# EAGLE board LipoPower (EAGLE 8.1.0)
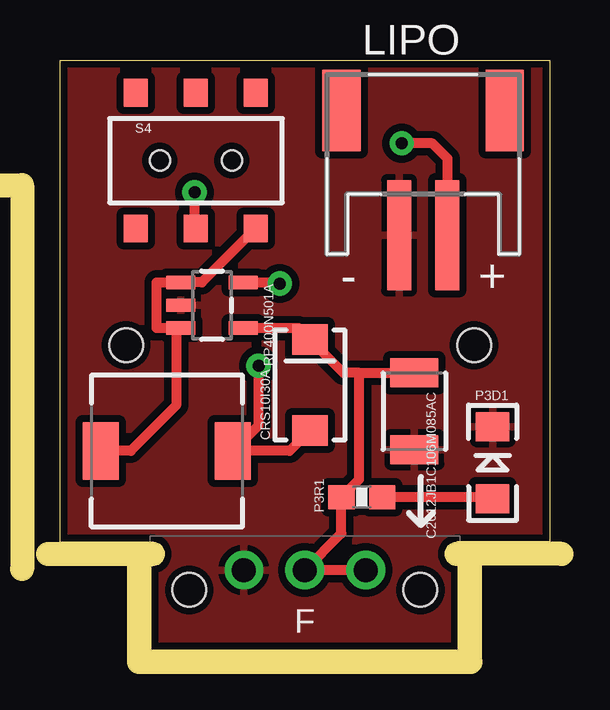
[diagram p0: board, top side]
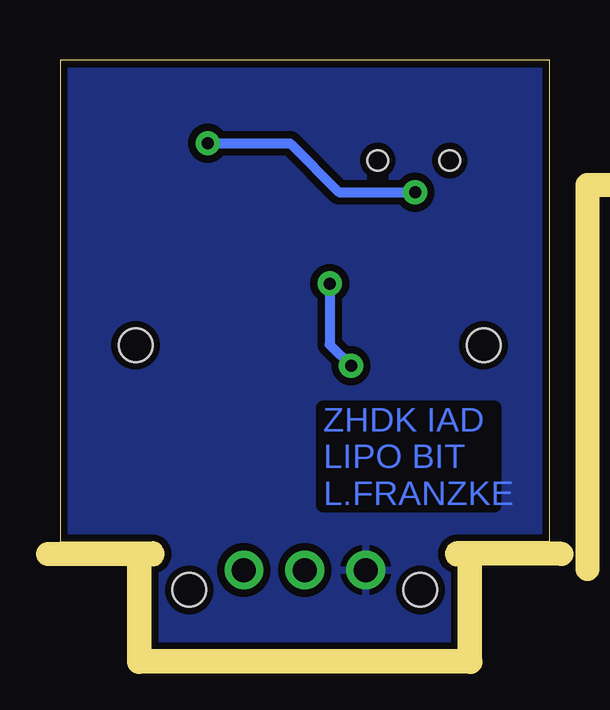
[diagram p1: board, bottom side, seen from below]

Size 20.4 x 24.58 mm. Coordinates in mm from the lower left corner, seen from the top.
Outline: 0,4.5 0,24.58 20.4,24.58 20.4,4.5
Copper layers (1*16): Top 0.035mm / dielectric 1.5mm / Bottom 0.035mm
Design rules "default": minimum track width 8mil, minimum drill 20mil, track to track 8mil, track to pad 8mil, pad to pad 8mil, via to via 8mil, smd to smd 8mil, copper to edge 10mil, drill to drill 8mil, minimum pad ring 12mil, minimum via ring 10mil, stop-mask expansion 4mil, vias tented up to drill 25mil, thermal gap 10mil
Milling: 3 lines

## Footprints (pad centres in the part's own frame; a part is rotated, then mirrored left to right if it is on the bottom)
1210 = smd 1.2 x 2: 1 -1.6,0; 2 1.6,0
SMA-DIODE = smd 1.27 x 1.47: A -1.9,0; C 1.9,0
B82462G = smd 2.4 x 1.5: P$1 0,2.75; P$2 0,-2.75
JST-PH-2-SMT-RA = smd 1 x 4.6: 1 1,-3.7; 2 -1,-3.7 | smd 1.6 x 3.4: NC1 -3.4,1.5; NC2 3.4,1.5
BITSNAP_V03_FEMALE = drill 1: GND 3.91,3.33; SIG 6.45,3.33; VCC 8.99,3.33 | hole 1.4: 1.63,2.5; 11.27,2.5
LED-1206 = smd 1.2 x 1.4: A -1.5,0; C 1.5,0
0603-RES = smd 1.1 x 1: 1 -0.85,0; 2 0.85,0
SOT23-5 = smd 0.55 x 1.2: 1 -0.95,-1.3; 2 0,-1.3; 3 0.95,-1.3; 4 0.95,1.3; 5 -0.95,1.3
AYZ0202 = smd 1 x 1.15: 1 -2.5,2.825; 2 0,2.825; 3 2.5,2.825; 4 -2.5,-2.825; 5 0,-2.825; 6 2.5,-2.825 | hole 0.85: 1.5,0; -1.5,0
LB_PWR_LEGS = hole 1.4: 2.75,4.4; 17.25,4.4

## Placement (x,y rotation side)
C2012JB1C106M085AC  10uF  [1210]  14.76,9.95 270 top
CRS10I30A  BA340A  [SMA-DIODE]  10.41,11.04 90 top
IND.  TDK SLF7045T-100M1R3-PF  [B82462G]  4.46,8.29 90 top
LIPO  BAT  [JST-PH-2-SMT-RA]  15.13,20.98 0 top
P3BSF1  BITSNAP_V03_FEMALE  [BITSNAP_V03_FEMALE]  3.75,0 0 top
P3D1  Red  [LED-1206]  18.02,7.8 90 top
P3R1  220  [0603-RES]  12.58,6.37 0 top
RP400N501A  RP400N501A  [SOT23-5]  6.33,14.36 270 top
S4  AYZ0202  [AYZ0202]  5.67,20.39 0 top
U$2  FRAME-LETTER-OHWOHW  [FABDWG01-OHW]  0.1,0.15 0 top
U$15  [LB_PWR_LEGS]  0,8.3 0 top

## Library data of the parts
C2012JB1C106M085AC = SparkFun-Capacitors; PROD_ID: CAP-10381
CRS10I30A = SparkFun-DiscreteSemi; PROD_ID: DIO-09886
IND. P3D1 P3R1 = SparkFun
LIPO = adafruit
P3BSF1 = bitSnap
RP400N501A = RP400N501A
S4 = SparkFun-Electromechanical; PROD_ID: SWCH-08179
U$2 U$15 = LITTLEBITS

## Nets
GND: C2012JB1C106M085AC.2 LIPO.2 P3BSF1.GND P3D1.C RP400N501A.2
N$1: P3D1.A P3R1.2
N$3: CRS10I30A.A IND..P$2 RP400N501A.5
N$21: IND..P$1 RP400N501A.1 RP400N501A.3 S4.6
VCC: C2012JB1C106M085AC.1 CRS10I30A.C P3BSF1.SIG P3BSF1.VCC P3R1.1 RP400N501A.4
VIN: LIPO.1 S4.5

## Tracks (layer width: path | path; a pad name or v marks a point on that pad's centre or on a via)
GND
  pour Top (isolate 0.305): 0.17,24.39 20.2,24.42 20.2,0.17 0.17,0.19
  pour Bottom (isolate 0.305): 0.17,24.39 20.2,24.42 20.2,0.17 0.17,0.2
N$1
  Top 0.406: P3D1.A 17.45,6.37 P3R1.2
N$3  (via drill 0.5)
  Top 0.406: CRS10I30A.A 9.56,8.29 IND..P$2 8.27,9.36 v8.27,11.84 | RP400N501A.5 9.16,15.31 v9.16,15.26
  Bottom 0.406: v9.16,15.26 9.16,12.72 v8.27,11.84 8.27,11.71
N$21
  Top 0.406: S4.6 5.91,15.31 RP400N501A.1 4.53,15.31 4.03,15.31 4.03,13.41 RP400N501A.3 4.84,13.22 4.84,10.19 2.95,8.29 IND..P$1
VCC
  Top 0.406: P3BSF1.VCC P3BSF1.SIG 11.73,4.86 P3R1.1 12.46,7.1 12.46,11.55 | RP400N501A.4 9.94,13.41 CRS10I30A.C 11.8,11.55 12.46,11.55 | 12.46,11.55 C2012JB1C106M085AC.1
VIN  (via drill 0.5)
  Top 0.406: LIPO.1 16.15,17.3 16.15,20.47 15.51,21.11 v14.24,21.11 14.11,21.11 | S4.5 5.6,17.63 v5.6,19.08
  Bottom 0.406: v14.24,21.11 10.81,21.11 8.78,19.08 v5.6,19.08 5.35,19.08

## Text on the board
Bottom: ZHDK IAD / LIPO BIT / L.FRANZKE
bStop: ZHDK IAD / LIPO BIT / L.FRANZKE | Luke Franzke 2016 | Luke Franzke 2016
Milling: 1mm DIA. ROUTER PATH
dxf: 1 | p3 USB POWER BIT PCB